# Altium PCB BuySellDisplay4.PcbDoc (part 1 of 3)
Units mm, origin at the board's own origin, x right, y up, seen from the top; angles counter-clockwise.
Board outline 355.85 x 151.13 mm, 2 copper layers (Top Layer, Bottom Layer); 219 components, 209 nets, 584 pads, 68 vias.
Unrouted connection lines stored in the file: 3.
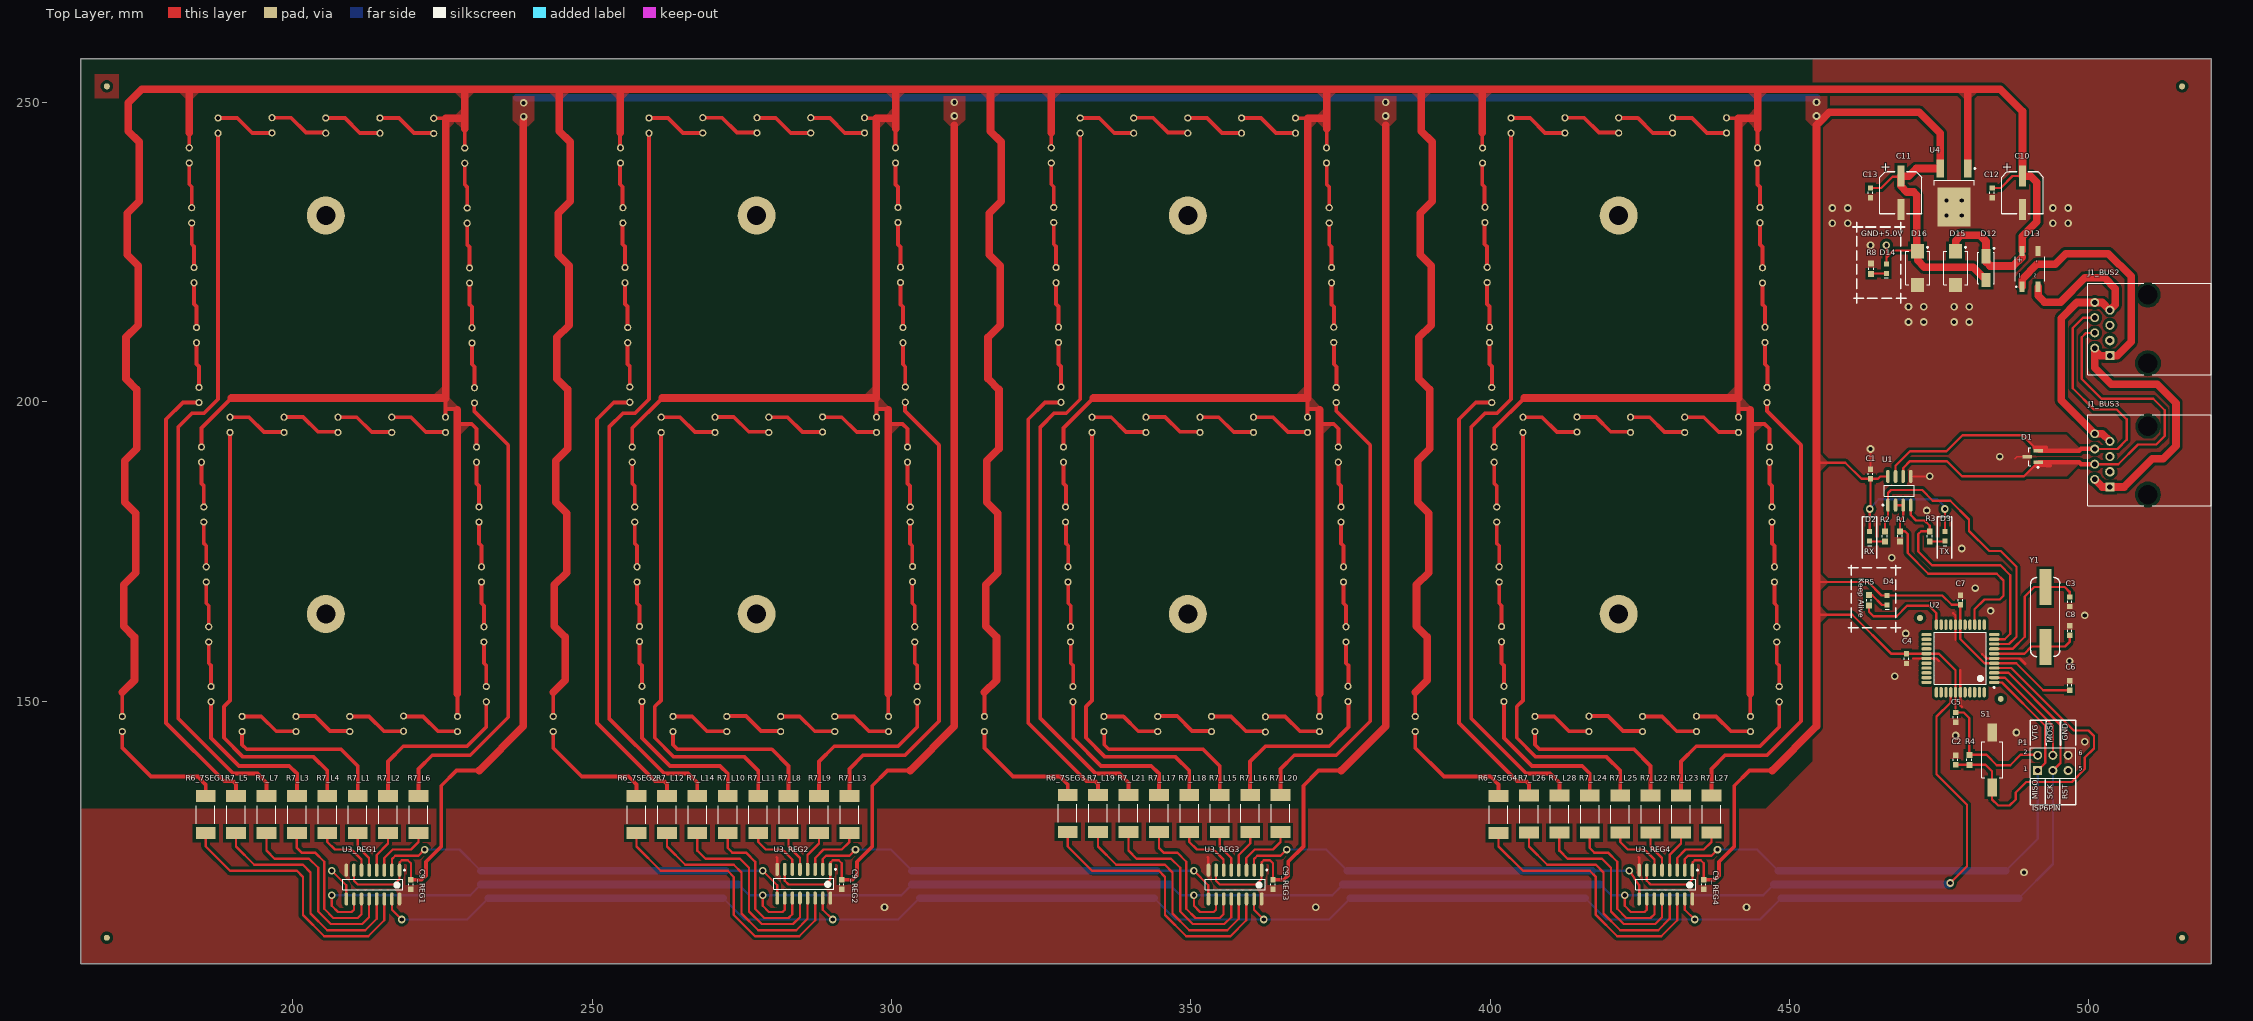
[diagram p0: Top Layer view]
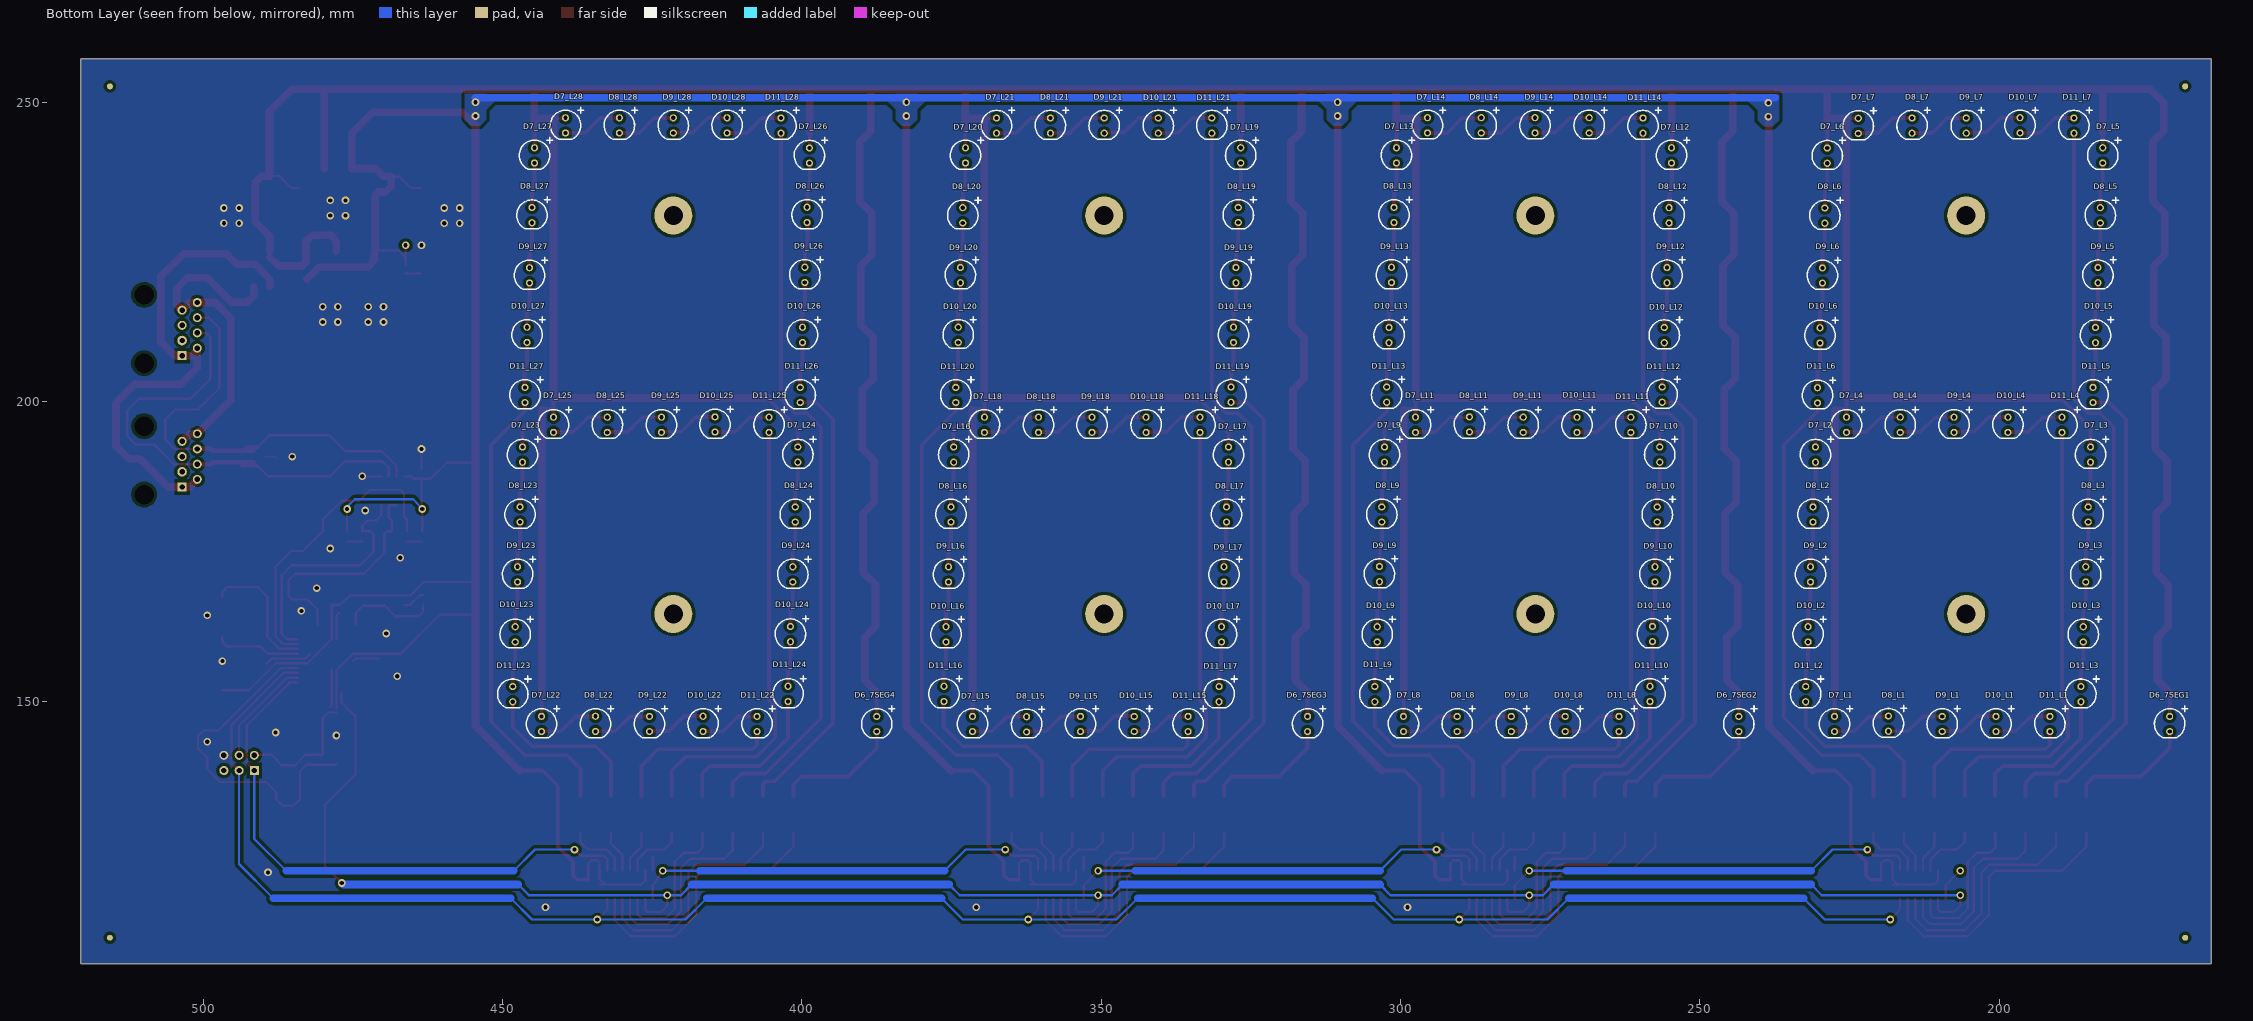
[diagram p1: Bottom Layer view, seen from below]

## Layer stack, top to bottom
Top Layer: signal copper 0.0356
Dielectric: dielectric 0.32, FR-4, Dk 4.8
Bottom Layer: signal copper 0.0356

## Board outline
520.446,106.172 520.446,257.302 164.592,257.302 164.592,106.172

## Design rules (kind name [scope] priority, off if disabled: settings)
Clearance [All] p1: gap=0.508
ComponentClearance [All] p1: gap=0.254 collisioncheckmode=3 verticalgap=0.254
PolygonConnect [All] p1: connectstyle=Direct reliefconductorwidth=0.381 reliefentries=4 polygonreliefangle="90 Angle"
RoomDefinition BUS2 [InComponentClass('BUS2')] p1: confinementstyle=ConfineIn formatcopy=TRUE lockcomponents=FALSE outline 0,0 50.8,0 50.8,25.4 0,25.4
RoomDefinition BUS3 [InComponentClass('BUS3')] p2: confinementstyle=ConfineIn formatcopy=TRUE lockcomponents=FALSE outline 0,0 50.8,0 50.8,25.4 0,25.4
RoomDefinition REG3 [InComponentClass('REG3')] p3: confinementstyle=ConfineIn formatcopy=TRUE lockcomponents=FALSE outline 0,0 50.8,0 50.8,25.4 0,25.4
RoomDefinition SUPPLY [InComponentClass('SUPPLY')] p4: confinementstyle=ConfineIn formatcopy=TRUE lockcomponents=FALSE outline 0,0 50.8,0 50.8,25.4 0,25.4
RoomDefinition CPU [InComponentClass('CPU')] p5: confinementstyle=ConfineIn formatcopy=TRUE lockcomponents=FALSE outline 0,0 50.8,0 50.8,25.4 0,25.4
RoomDefinition COM485 [InComponentClass('COM485')] p6: confinementstyle=ConfineIn formatcopy=TRUE lockcomponents=FALSE outline 0,0 50.8,0 50.8,25.4 0,25.4
RoomDefinition REG2 [InComponentClass('REG2')] p7: confinementstyle=ConfineIn formatcopy=TRUE lockcomponents=FALSE outline 0,0 50.8,0 50.8,25.4 0,25.4
RoomDefinition L6 [InComponentClass('L6')] p8: confinementstyle=ConfineIn formatcopy=TRUE lockcomponents=FALSE outline 0,0 50.8,0 50.8,25.4 0,25.4
RoomDefinition L4 [InComponentClass('L4')] p9: confinementstyle=ConfineIn formatcopy=TRUE lockcomponents=FALSE outline 0,0 50.8,0 50.8,25.4 0,25.4
RoomDefinition L7 [InComponentClass('L7')] p10: confinementstyle=ConfineIn formatcopy=TRUE lockcomponents=FALSE outline 0,0 50.8,0 50.8,25.4 0,25.4
RoomDefinition L5 [InComponentClass('L5')] p11: confinementstyle=ConfineIn formatcopy=TRUE lockcomponents=FALSE outline 0,0 50.8,0 50.8,25.4 0,25.4
RoomDefinition L3 [InComponentClass('L3')] p12: confinementstyle=ConfineIn formatcopy=TRUE lockcomponents=FALSE outline 0,0 50.8,0 50.8,25.4 0,25.4
RoomDefinition L2 [InComponentClass('L2')] p13: confinementstyle=ConfineIn formatcopy=TRUE lockcomponents=FALSE outline 0,0 50.8,0 50.8,25.4 0,25.4
RoomDefinition L1 [InComponentClass('L1')] p14: confinementstyle=ConfineIn formatcopy=TRUE lockcomponents=FALSE outline 0,0 50.8,0 50.8,25.4 0,25.4
RoomDefinition 7SEG1 [InComponentClass('7SEG1')] p15: confinementstyle=ConfineIn formatcopy=TRUE lockcomponents=FALSE outline 0,0 50.8,0 50.8,25.4 0,25.4
RoomDefinition REG4 [InComponentClass('REG4')] p16: confinementstyle=ConfineIn formatcopy=TRUE lockcomponents=FALSE outline 0,0 50.8,0 50.8,25.4 0,25.4
RoomDefinition REG1 [InComponentClass('REG1')] p17: confinementstyle=ConfineIn formatcopy=TRUE lockcomponents=FALSE outline 0,0 50.8,0 50.8,25.4 0,25.4
RoomDefinition L28 [InComponentClass('L28')] p18: confinementstyle=ConfineIn formatcopy=TRUE lockcomponents=FALSE outline 0,0 50.8,0 50.8,25.4 0,25.4
RoomDefinition L27 [InComponentClass('L27')] p19: confinementstyle=ConfineIn formatcopy=TRUE lockcomponents=FALSE outline 0,0 50.8,0 50.8,25.4 0,25.4
RoomDefinition L26 [InComponentClass('L26')] p20: confinementstyle=ConfineIn formatcopy=TRUE lockcomponents=FALSE outline 0,0 50.8,0 50.8,25.4 0,25.4
RoomDefinition L25 [InComponentClass('L25')] p21: confinementstyle=ConfineIn formatcopy=TRUE lockcomponents=FALSE outline 0,0 50.8,0 50.8,25.4 0,25.4
RoomDefinition L24 [InComponentClass('L24')] p22: confinementstyle=ConfineIn formatcopy=TRUE lockcomponents=FALSE outline 0,0 50.8,0 50.8,25.4 0,25.4
RoomDefinition L23 [InComponentClass('L23')] p23: confinementstyle=ConfineIn formatcopy=TRUE lockcomponents=FALSE outline 0,0 50.8,0 50.8,25.4 0,25.4
RoomDefinition L22 [InComponentClass('L22')] p24: confinementstyle=ConfineIn formatcopy=TRUE lockcomponents=FALSE outline 0,0 50.8,0 50.8,25.4 0,25.4
RoomDefinition L21 [InComponentClass('L21')] p25: confinementstyle=ConfineIn formatcopy=TRUE lockcomponents=FALSE outline 0,0 50.8,0 50.8,25.4 0,25.4
RoomDefinition L20 [InComponentClass('L20')] p26: confinementstyle=ConfineIn formatcopy=TRUE lockcomponents=FALSE outline 0,0 50.8,0 50.8,25.4 0,25.4
RoomDefinition L19 [InComponentClass('L19')] p27: confinementstyle=ConfineIn formatcopy=TRUE lockcomponents=FALSE outline 0,0 50.8,0 50.8,25.4 0,25.4
RoomDefinition L18 [InComponentClass('L18')] p28: confinementstyle=ConfineIn formatcopy=TRUE lockcomponents=FALSE outline 0,0 50.8,0 50.8,25.4 0,25.4
RoomDefinition L17 [InComponentClass('L17')] p29: confinementstyle=ConfineIn formatcopy=TRUE lockcomponents=FALSE outline 0,0 50.8,0 50.8,25.4 0,25.4
RoomDefinition L16 [InComponentClass('L16')] p30: confinementstyle=ConfineIn formatcopy=TRUE lockcomponents=FALSE outline 0,0 50.8,0 50.8,25.4 0,25.4
RoomDefinition L15 [InComponentClass('L15')] p31: confinementstyle=ConfineIn formatcopy=TRUE lockcomponents=FALSE outline 0,0 50.8,0 50.8,25.4 0,25.4
RoomDefinition L14 [InComponentClass('L14')] p32: confinementstyle=ConfineIn formatcopy=TRUE lockcomponents=FALSE outline 0,0 50.8,0 50.8,25.4 0,25.4
RoomDefinition L13 [InComponentClass('L13')] p33: confinementstyle=ConfineIn formatcopy=TRUE lockcomponents=FALSE outline 0,0 50.8,0 50.8,25.4 0,25.4
RoomDefinition L12 [InComponentClass('L12')] p34: confinementstyle=ConfineIn formatcopy=TRUE lockcomponents=FALSE outline 0,0 50.8,0 50.8,25.4 0,25.4
RoomDefinition L11 [InComponentClass('L11')] p35: confinementstyle=ConfineIn formatcopy=TRUE lockcomponents=FALSE outline 0,0 50.8,0 50.8,25.4 0,25.4
RoomDefinition L10 [InComponentClass('L10')] p36: confinementstyle=ConfineIn formatcopy=TRUE lockcomponents=FALSE outline 0,0 50.8,0 50.8,25.4 0,25.4
RoomDefinition L9 [InComponentClass('L9')] p37: confinementstyle=ConfineIn formatcopy=TRUE lockcomponents=FALSE outline 0,0 50.8,0 50.8,25.4 0,25.4
RoomDefinition L8 [InComponentClass('L8')] p38: confinementstyle=ConfineIn formatcopy=TRUE lockcomponents=FALSE outline 0,0 50.8,0 50.8,25.4 0,25.4
RoomDefinition 7SEG4 [InComponentClass('7SEG4')] p39: confinementstyle=ConfineIn formatcopy=TRUE lockcomponents=FALSE outline 0,0 50.8,0 50.8,25.4 0,25.4
RoomDefinition 7SEG3 [InComponentClass('7SEG3')] p40: confinementstyle=ConfineIn formatcopy=TRUE lockcomponents=FALSE outline 0,0 50.8,0 50.8,25.4 0,25.4
RoomDefinition 7SEG2 [InComponentClass('7SEG2')] p41: confinementstyle=ConfineIn formatcopy=TRUE lockcomponents=FALSE outline 0,0 50.8,0 50.8,25.4 0,25.4
RoutingVias [All] p1: holewidth=0.711 width=1.27 viastyle="Through Hole" minholewidth=0.711 minwidth=1.27 maxholewidth=0.711 maxwidth=1.27
SolderMaskExpansion [All] p1: expansion=0.102
TestPointUsage [All] p1: valid=0 allowmultiple=FALSE
Testpoint [All] p1: side=15 testpointundercomponent=TRUE minsize=1.016 maxsize=2.54 preferedsize=1.524 minholesize=0 maxholesize=1.016 preferedholesize=0.813 testpointgrid=0.025 style=1023 order=0123456789
Width GROUND [(InNet('GND'))] p1: maxlimit=0.381 minlimit=0.254 preferedwidth=0.381
Width Drain [( InNet('SEGA_7SEG1') AND InNet('SEGB_7SEG1') AND InNet('SEGC_7SEG1') AND InNet('SEGD_7SEG1') AND InNet('SEGE_7SEG1') AND InNet('SEGF_7SEG1') AND InNet('SEGG_7SEG1') AND InNet('DOT_7SEG1') AND   InNet('SEGA_7SEG2') AND InNet('SEGB_7SEG2') AND InNet('SEGC_7SEG2') AND InNet('SEGD_7SEG2') AND InNet('SEGE_7SEG2') AND InNet('SEGF_7SEG2') AND InNet('SEGG_7SEG2') AND InNet('DOT_7SEG2') AND  InNet('SEGA_7SEG3') AND InNet('SEGB_7SEG3') AND InNet('SEGC_7SEG3') AND InNet('SEGD_7SEG3') AND InNet('SEGE_7SEG3') AND InNet('SEGF_7SEG3') AND InNet('SEGG_7SEG3') AND InNet('DOT_7SEG3') AND  InNet('SEGA_7SEG4') AND InNet('SEGB_7SEG4') AND InNet('SEGC_7SEG4') AND InNet('SEGD_7SEG4') AND InNet('SEGE_7SEG4') AND InNet('SEGF_7SEG4') AND InNet('SEGG_7SEG4') AND InNet('DOT_7SEG4')   )] p2: maxlimit=0.381 minlimit=0.381 preferedwidth=0.381
Width LEDS_7SEG [(InNet('NetD7_L1_K') AND InNet('NetD7_L2_K') AND InNet('NetD7_L3_K') AND InNet('NetD7_L4_K') AND InNet('NetD7_L5_K') AND InNet('NetD7_L6_K') AND InNet('NetD7_L7_K') AND InNet('NetD7_L8_K') AND InNet('NetD7_L9_K') AND InNet('NetD7_L10_K') AND InNet('NetD7_L11_K') AND InNet('NetD7_L12_K') AND InNet('NetD7_L13_K') AND InNet('NetD7_L14_K') AND InNet('NetD7_L15_K') AND InNet('NetD7_L16_K') AND InNet('NetD7_L17_K') AND InNet('NetD7_L18_K') AND InNet('NetD7_L19_K') AND InNet('NetD7_L20_K') AND InNet('NetD7_L21_K') AND InNet('NetD7_L22_K') AND InNet('NetD7_L23_K') AND InNet('NetD7_L24_K') AND InNet('NetD7_L25_K') AND InNet('NetD7_L26_K') AND InNet('NetD7_L27_K') AND InNet('NetD7_L28_K') AND   InNet('NetD8_L1_K') AND InNet('NetD8_L2_K') AND InNet('NetD8_L3_K') AND InNet('NetD8_L4_K') AND InNet('NetD8_L5_K') AND InNet('NetD8_L6_K') AND InNet('NetD8_L7_K') AND InNet('NetD8_L8_K') AND InNet('NetD8_L9_K') AND InNet('NetD8_L10_K') AND InNet('NetD8_L11_K') AND InNet('NetD8_L12_K') AND InNet('NetD8_L13_K') AND InNet('NetD8_L14_K') AND InNet('NetD8_L15_K') AND InNet('NetD8_L16_K') AND InNet('NetD8_L17_K') AND InNet('NetD8_L18_K') AND InNet('NetD8_L19_K') AND InNet('NetD8_L20_K') AND InNet('NetD8_L21_K') AND InNet('NetD8_L22_K') AND InNet('NetD8_L23_K') AND InNet('NetD8_L24_K') AND InNet('NetD8_L25_K') AND InNet('NetD8_L26_K') AND InNet('NetD8_L27_K') AND InNet('NetD8_L28_K') AND    InNet('NetD9_L1_K') AND InNet('NetD9_L2_K') AND InNet('NetD9_L3_K') AND InNet('NetD9_L4_K') AND InNet('NetD9_L5_K') AND InNet('NetD9_L6_K') AND InNet('NetD9_L7_K') AND InNet('NetD9_L8_K') AND InNet('NetD9_L9_K') AND InNet('NetD9_L10_K') AND InNet('NetD9_L11_K') AND InNet('NetD9_L12_K') AND InNet('NetD9_L13_K') AND InNet('NetD9_L14_K') AND InNet('NetD9_L15_K') AND InNet('NetD9_L16_K') AND InNet('NetD9_L17_K') AND InNet('NetD9_L18_K') AND InNet('NetD9_L19_K') AND InNet('NetD9_L20_K') AND InNet('NetD9_L21_K') AND InNet('NetD9_L22_K') AND InNet('NetD9_L23_K') AND InNet('NetD9_L24_K') AND InNet('NetD9_L25_K') AND InNet('NetD9_L26_K') AND InNet('NetD9_L27_K') AND InNet('NetD9_L28_K') AND    InNet('NetD10_L1_K') AND InNet('NetD10_L2_K') AND InNet('NetD10_L3_K') AND InNet('NetD10_L4_K') AND InNet('NetD10_L5_K') AND InNet('NetD10_L6_K') AND InNet('NetD10_L7_K') AND InNet('NetD10_L8_K') AND InNet('NetD10_L9_K') AND InNet('NetD10_L10_K') AND InNet('NetD10_L11_K') AND InNet('NetD10_L12_K') AND InNet('NetD10_L13_K') AND InNet('NetD10_L14_K') AND InNet('NetD10_L15_K') AND InNet('NetD10_L16_K') AND InNet('NetD10_L17_K') AND InNet('NetD10_L18_K') AND InNet('NetD10_L19_K') AND InNet('NetD10_L20_K') AND InNet('NetD10_L21_K') AND InNet('NetD10_L22_K') AND InNet('NetD10_L23_K') AND InNet('NetD10_L24_K') AND InNet('NetD10_L25_K') AND InNet('NetD10_L26_K') AND InNet('NetD10_L27_K') AND InNet('NetD10_L28_K') AND    InNet('NetD11_L1_K') AND InNet('NetD11_L2_K') AND InNet('NetD11_L3_K') AND InNet('NetD11_L4_K') AND InNet('NetD11_L5_K') AND InNet('NetD11_L6_K') AND InNet('NetD11_L7_K') AND InNet('NetD11_L8_K') AND InNet('NetD11_L9_K') AND InNet('NetD11_L10_K') AND InNet('NetD11_L11_K') AND InNet('NetD11_L12_K') AND InNet('NetD11_L13_K') AND InNet('NetD11_L14_K') AND InNet('NetD11_L15_K') AND InNet('NetD11_L16_K') AND InNet('NetD11_L17_K') AND InNet('NetD11_L18_K') AND InNet('NetD11_L19_K') AND InNet('NetD11_L20_K') AND InNet('NetD11_L21_K') AND InNet('NetD11_L22_K') AND InNet('NetD11_L23_K') AND InNet('NetD11_L24_K') AND InNet('NetD11_L25_K') AND InNet('NetD11_L26_K') AND InNet('NetD11_L27_K') AND InNet('NetD11_L28_K')  )] p3: maxlimit=1.27 minlimit=0.508 preferedwidth=1.27
Width Power [(InNet('POWER_V+') AND InNet('POWER_V-'))] p4: maxlimit=1.27 minlimit=0.635 preferedwidth=1.27
18 further rules are at their usual default settings.

## Classes and differential pairs
component class BUS2: J1_BUS1 J1_BUS2
component class BUS3: J1_BUS3
component class REG1: C9_REG1 U3_REG1
component class REG2: C9_REG2 U3_REG2
component class REG3: C9_REG3 U3_REG3
component class REG4: C9_REG4 U3_REG4
channel class TPIC6B595_CommunicationInterface: REG1 REG2 REG3 REG4
channel class Line: L1 L2 L3 L4 L5 L6 L7 L8 L9 L10 L11 L12 L13 L14 L15 L16 L17 L18 L19 L20 L21 L22 L23 L24 L25 L26 L27 L28
channel class Led7Seg: 7SEG1 7SEG2 7SEG3 7SEG4
channel class BUSConnector: BUS2 BUS3
component class SUPPLY: C10 C11 C12 C13 D12 D13 D14 D15 D16 R8 U4
component class L28: D7_L28 D8_L28 D9_L28 D10_L28 D11_L28 R7_L28
component class L27: D7_L27 D8_L27 D9_L27 D10_L27 D11_L27 R7_L27
component class L26: D7_L26 D8_L26 D9_L26 D10_L26 D11_L26 R7_L26
component class L25: D7_L25 D8_L25 D9_L25 D10_L25 D11_L25 R7_L25
component class L24: D7_L24 D8_L24 D9_L24 D10_L24 D11_L24 R7_L24
component class L23: D7_L23 D8_L23 D9_L23 D10_L23 D11_L23 R7_L23
component class L22: D7_L22 D8_L22 D9_L22 D10_L22 D11_L22 R7_L22
component class L21: D7_L21 D8_L21 D9_L21 D10_L21 D11_L21 R7_L21
component class L20: D7_L20 D8_L20 D9_L20 D10_L20 D11_L20 R7_L20
component class L19: D7_L19 D8_L19 D9_L19 D10_L19 D11_L19 R7_L19
component class L18: D7_L18 D8_L18 D9_L18 D10_L18 D11_L18 R7_L18
component class L17: D7_L17 D8_L17 D9_L17 D10_L17 D11_L17 R7_L17
component class L16: D7_L16 D8_L16 D9_L16 D10_L16 D11_L16 R7_L16
component class L15: D7_L15 D8_L15 D9_L15 D10_L15 D11_L15 R7_L15
component class L14: D7_L14 D8_L14 D9_L14 D10_L14 D11_L14 R7_L14
component class L13: D7_L13 D8_L13 D9_L13 D10_L13 D11_L13 R7_L13
component class L12: D7_L12 D8_L12 D9_L12 D10_L12 D11_L12 R7_L12
component class L11: D7_L11 D8_L11 D9_L11 D10_L11 D11_L11 R7_L11
component class L10: D7_L10 D8_L10 D9_L10 D10_L10 D11_L10 R7_L10
component class L9: D7_L9 D8_L9 D9_L9 D10_L9 D11_L9 R7_L9
component class L8: D7_L8 D8_L8 D9_L8 D10_L8 D11_L8 R7_L8
component class L7: D7_L7 D8_L7 D9_L7 D10_L7 D11_L7 R7_L7
component class L6: D7_L6 D8_L6 D9_L6 D10_L6 D11_L6 R7_L6
component class L5: D7_L5 D8_L5 D9_L5 D10_L5 D11_L5 R7_L5
component class L4: D7_L4 D8_L4 D9_L4 D10_L4 D11_L4 R7_L4
component class L3: D7_L3 D8_L3 D9_L3 D10_L3 D11_L3 R7_L3
component class L2: D7_L2 D8_L2 D9_L2 D10_L2 D11_L2 R7_L2
component class L1: D7_L1 D8_L1 D9_L1 D10_L1 D11_L1 R7_L1
component class CPU: C2 C3 C4 C5 C6 C7 C8 D4 P1 R4 R5 S1 U2 Y1
component class COM485: C1 D1 D2 D3 R1 R2 R3 U1
component class 7SEG4: D6_7SEG4 R6_7SEG4
component class 7SEG3: D6_7SEG3 R6_7SEG3
component class 7SEG2: D6_7SEG2 R6_7SEG2
component class 7SEG1: D6_7SEG1 R6_7SEG1

## Components (designator, comment, footprint, x,y, rotation, side; value= is the part's Value field where it differs from the comment)
C1 "CAP0.1uF" CAP0603 463.55,187.96 r90 top
C2 "CAP0.1uF" CAP0603 477.774,140.208 r90 top
C3 "CAP18pF" CAP0603 496.824,166.624 r270 top
C4 "CAP0.1uF" CAP0603 469.568,157.115 r270 top
C5 "CAP0.1uF" CAP0603 477.774,147.32 r270 top
C6 "CAP0.1uF" CAP0603 496.824,152.654 r90 top
C7 "CAP0.1uF" CAP0603 478.585,166.894 r90 top
C8 "CAP18pF" CAP0603 496.824,161.798 r90 top
C9_REG1 "CAP0.1uF" CAP0603 219.71,119.38 r270 top (schematic designator C9)
C9_REG2 "CAP0.1uF" CAP0603 291.694,119.38 r270 top (schematic designator C9)
C9_REG3 "CAP0.1uF" CAP0603 363.728,119.38 r270 top (schematic designator C9)
C9_REG4 "CAP0.1uF" CAP0603 435.712,119.38 r270 top (schematic designator C9)
C10 "CAP100uF" EEH-ZA1E101XP 488.95,234.95 r270 top
C11 "CAP47uF" EEH-ZA1E101XP 468.63,234.95 r270 top
C12 "CAP0.1uF" CAP0603 483.87,234.95 r270 top
C13 "CAP0.1uF" CAP0603 463.55,234.95 r270 top
D1 "SM712-02HTG" SW712 490.656,190.881 r180 top
D2 "LEDY" 150060YS75000 463.423,177.546 r90 top
D3 "LEDY" 150060YS75000 475.996,177.546 r90 top
D4 "LEDY" 150060YS75000 466.344,166.878 r90 top
D6_7SEG1 "Oval Led" LED 171.501,147.472 r270 bottom (schematic designator D6)
D6_7SEG2 "Oval Led" LED 243.484,147.472 r270 bottom (schematic designator D6)
D6_7SEG3 "Oval Led" LED 315.519,147.472 r270 bottom (schematic designator D6)
D6_7SEG4 "Oval Led" LED 387.502,147.472 r270 bottom (schematic designator D6)
D7_L1 "Oval Led" LED 227.482,147.472 r270 bottom (schematic designator D7)
D7_L2 "Oval Led" LED 230.683,192.481 r270 bottom (schematic designator D7)
D7_L3 "Oval Led" LED 184.709,192.481 r270 bottom (schematic designator D7)
D7_L4 "Oval Led" LED 225.501,197.46 r270 bottom (schematic designator D7)
D7_L5 "Oval Led" LED 182.677,242.468 r270 bottom (schematic designator D7)
D7_L6 "Oval Led" LED 228.702,242.418 r270 bottom (schematic designator D7)
D7_L7 "Oval Led" LED 223.52,247.396 r270 bottom (schematic designator D7)
D7_L8 "Oval Led" LED 299.517,147.472 r270 bottom (schematic designator D7)
D7_L9 "Oval Led" LED 302.666,192.481 r270 bottom (schematic designator D7)
D7_L10 "Oval Led" LED 256.692,192.481 r270 bottom (schematic designator D7)
D7_L11 "Oval Led" LED 297.485,197.46 r270 bottom (schematic designator D7)
D7_L12 "Oval Led" LED 254.711,242.468 r270 bottom (schematic designator D7)
D7_L13 "Oval Led" LED 300.685,242.468 r270 bottom (schematic designator D7)
D7_L14 "Oval Led" LED 295.504,247.498 r270 bottom (schematic designator D7)
D7_L15 "Oval Led" LED 371.5,147.472 r270 bottom (schematic designator D7)
D7_L16 "Oval Led" LED 374.65,192.481 r270 bottom (schematic designator D7)
D7_L17 "Oval Led" LED 328.727,192.481 r270 bottom (schematic designator D7)
D7_L18 "Oval Led" LED 369.519,197.46 r270 bottom (schematic designator D7)
D7_L19 "Oval Led" LED 326.695,242.468 r270 bottom (schematic designator D7)
D7_L20 "Oval Led" LED 372.669,242.468 r270 bottom (schematic designator D7)
D7_L21 "Oval Led" LED 367.487,247.447 r270 bottom (schematic designator D7)
D7_L22 "Oval Led" LED 443.509,147.472 r270 bottom (schematic designator D7)
D7_L23 "Oval Led" LED 446.684,192.481 r270 bottom (schematic designator D7)
D7_L24 "Oval Led" LED 400.685,192.481 r270 bottom (schematic designator D7)
D7_L25 "Oval Led" LED 441.503,197.46 r270 bottom (schematic designator D7)
D7_L26 "Oval Led" LED 398.755,242.443 r270 bottom (schematic designator D7)
D7_L27 "Oval Led" LED 444.678,242.468 r270 bottom (schematic designator D7)
D7_L28 "Oval Led" LED 439.496,247.472 r270 bottom (schematic designator D7)
D8_L1 "Oval Led" LED 218.491,147.523 r270 bottom (schematic designator D8)
D8_L2 "Oval Led" LED 231.089,182.474 r270 bottom (schematic designator D8)
D8_L3 "Oval Led" LED 185.115,182.474 r270 bottom (schematic designator D8)
D8_L4 "Oval Led" LED 216.51,197.46 r270 bottom (schematic designator D8)
D8_L5 "Oval Led" LED 183.083,232.461 r270 bottom (schematic designator D8)
D8_L6 "Oval Led" LED 229.108,232.41 r270 bottom (schematic designator D8)
D8_L7 "Oval Led" LED 214.528,247.447 r270 bottom (schematic designator D8)
D8_L8 "Oval Led" LED 290.525,147.472 r270 bottom (schematic designator D8)
D8_L9 "Oval Led" LED 303.124,182.474 r270 bottom (schematic designator D8)
D8_L10 "Oval Led" LED 257.099,182.474 r270 bottom (schematic designator D8)
D8_L11 "Oval Led" LED 288.493,197.51 r270 bottom (schematic designator D8)
D8_L12 "Oval Led" LED 255.118,232.461 r270 bottom (schematic designator D8)
D8_L13 "Oval Led" LED 301.092,232.512 r270 bottom (schematic designator D8)
D8_L14 "Oval Led" LED 286.512,247.498 r270 bottom (schematic designator D8)
D8_L15 "Oval Led" LED 362.458,147.422 r270 bottom (schematic designator D8)
D8_L16 "Oval Led" LED 375.107,182.474 r270 bottom (schematic designator D8)
D8_L17 "Oval Led" LED 329.082,182.474 r270 bottom (schematic designator D8)
D8_L18 "Oval Led" LED 360.477,197.46 r270 bottom (schematic designator D8)
D8_L19 "Oval Led" LED 327.101,232.512 r270 bottom (schematic designator D8)
D8_L20 "Oval Led" LED 373.126,232.461 r270 bottom (schematic designator D8)
D8_L21 "Oval Led" LED 358.496,247.447 r270 bottom (schematic designator D8)
D8_L22 "Oval Led" LED 434.492,147.498 r270 bottom (schematic designator D8)
D8_L23 "Oval Led" LED 447.091,182.474 r270 bottom (schematic designator D8)
D8_L24 "Oval Led" LED 401.117,182.474 r270 bottom (schematic designator D8)
D8_L25 "Oval Led" LED 432.511,197.46 r270 bottom (schematic designator D8)
D8_L26 "Oval Led" LED 399.136,232.537 r270 bottom (schematic designator D8)
D8_L27 "Oval Led" LED 445.11,232.486 r270 bottom (schematic designator D8)
D8_L28 "Oval Led" LED 430.505,247.472 r270 bottom (schematic designator D8)
D9_L1 "Oval Led" LED 209.499,147.472 r270 bottom (schematic designator D9)
D9_L2 "Oval Led" LED 231.496,172.466 r270 bottom (schematic designator D9)
D9_L3 "Oval Led" LED 185.522,172.466 r270 bottom (schematic designator D9)
D9_L4 "Oval Led" LED 207.518,197.46 r270 bottom (schematic designator D9)
D9_L5 "Oval Led" LED 183.49,222.453 r270 bottom (schematic designator D9)
D9_L6 "Oval Led" LED 229.514,222.402 r270 bottom (schematic designator D9)
D9_L7 "Oval Led" LED 205.486,247.447 r270 bottom (schematic designator D9)
D9_L8 "Oval Led" LED 281.483,147.472 r270 bottom (schematic designator D9)
D9_L9 "Oval Led" LED 303.53,172.517 r270 bottom (schematic designator D9)
D9_L10 "Oval Led" LED 257.505,172.466 r270 bottom (schematic designator D9)
D9_L11 "Oval Led" LED 279.502,197.46 r270 bottom (schematic designator D9)
D9_L12 "Oval Led" LED 255.473,222.453 r270 bottom (schematic designator D9)
D9_L13 "Oval Led" LED 301.498,222.504 r270 bottom (schematic designator D9)
D9_L14 "Oval Led" LED 277.52,247.498 r270 bottom (schematic designator D9)
D9_L15 "Oval Led" LED 353.466,147.472 r270 bottom (schematic designator D9)
D9_L16 "Oval Led" LED 375.514,172.466 r270 bottom (schematic designator D9)
D9_L17 "Oval Led" LED 329.489,172.466 r270 bottom (schematic designator D9)
D9_L18 "Oval Led" LED 351.536,197.46 r270 bottom (schematic designator D9)
D9_L19 "Oval Led" LED 327.508,222.453 r270 bottom (schematic designator D9)
D9_L20 "Oval Led" LED 373.532,222.453 r270 bottom (schematic designator D9)
D9_L21 "Oval Led" LED 349.504,247.447 r270 bottom (schematic designator D9)
D9_L22 "Oval Led" LED 425.475,147.472 r270 bottom (schematic designator D9)
D9_L23 "Oval Led" LED 447.497,172.466 r270 bottom (schematic designator D9)
D9_L24 "Oval Led" LED 401.523,172.466 r270 bottom (schematic designator D9)
D9_L25 "Oval Led" LED 423.469,197.46 r270 bottom (schematic designator D9)
D9_L26 "Oval Led" LED 399.517,222.504 r270 bottom (schematic designator D9)
D9_L27 "Oval Led" LED 445.516,222.428 r270 bottom (schematic designator D9)
D9_L28 "Oval Led" LED 421.488,247.472 r270 bottom (schematic designator D9)
D10_L1 "Oval Led" LED 200.508,147.472 r270 bottom (schematic designator D10)
D10_L2 "Oval Led" LED 231.902,162.458 r270 bottom (schematic designator D10)
D10_L3 "Oval Led" LED 185.928,162.458 r270 bottom (schematic designator D10)
D10_L4 "Oval Led" LED 198.526,197.46 r270 bottom (schematic designator D10)
D10_L5 "Oval Led" LED 183.896,212.446 r270 bottom (schematic designator D10)
D10_L6 "Oval Led" LED 229.921,212.395 r270 bottom (schematic designator D10)
D10_L7 "Oval Led" LED 196.494,247.498 r270 bottom (schematic designator D10)
D10_L8 "Oval Led" LED 272.491,147.472 r270 bottom (schematic designator D10)
D10_L9 "Oval Led" LED 303.886,162.458 r270 bottom (schematic designator D10)
D10_L10 "Oval Led" LED 257.912,162.509 r270 bottom (schematic designator D10)
D10_L11 "Oval Led" LED 270.51,197.46 r270 bottom (schematic designator D10)
D10_L12 "Oval Led" LED 255.93,212.446 r270 bottom (schematic designator D10)
D10_L13 "Oval Led" LED 301.904,212.446 r270 bottom (schematic designator D10)
D10_L14 "Oval Led" LED 268.478,247.498 r270 bottom (schematic designator D10)
D10_L15 "Oval Led" LED 344.475,147.472 r270 bottom (schematic designator D10)
D10_L16 "Oval Led" LED 375.92,162.458 r270 bottom (schematic designator D10)
D10_L17 "Oval Led" LED 329.895,162.458 r270 bottom (schematic designator D10)
D10_L18 "Oval Led" LED 342.494,197.46 r270 bottom (schematic designator D10)
D10_L19 "Oval Led" LED 327.914,212.496 r270 bottom (schematic designator D10)
D10_L20 "Oval Led" LED 373.888,212.496 r270 bottom (schematic designator D10)
D10_L21 "Oval Led" LED 340.462,247.447 r270 bottom (schematic designator D10)
D10_L22 "Oval Led" LED 416.509,147.498 r270 bottom (schematic designator D10)
D10_L23 "Oval Led" LED 447.904,162.458 r270 bottom (schematic designator D10)
D10_L24 "Oval Led" LED 401.93,162.484 r270 bottom (schematic designator D10)
D10_L25 "Oval Led" LED 414.528,197.51 r270 bottom (schematic designator D10)
D10_L26 "Oval Led" LED 399.898,212.471 r270 bottom (schematic designator D10)
D10_L27 "Oval Led" LED 445.922,212.496 r270 bottom (schematic designator D10)
D10_L28 "Oval Led" LED 412.496,247.472 r270 bottom (schematic designator D10)
D11_L1 "Oval Led" LED 191.516,147.472 r270 bottom (schematic designator D11)
D11_L2 "Oval Led" LED 232.308,152.451 r270 bottom (schematic designator D11)
D11_L3 "Oval Led" LED 186.334,152.451 r270 bottom (schematic designator D11)
D11_L4 "Oval Led" LED 189.484,197.46 r270 bottom (schematic designator D11)
D11_L5 "Oval Led" LED 184.302,202.438 r270 bottom (schematic designator D11)
D11_L6 "Oval Led" LED 230.327,202.387 r270 bottom (schematic designator D11)
D11_L7 "Oval Led" LED 187.503,247.447 r270 bottom (schematic designator D11)
D11_L8 "Oval Led" LED 263.5,147.472 r270 bottom (schematic designator D11)
D11_L9 "Oval Led" LED 304.292,152.451 r270 bottom (schematic designator D11)
D11_L10 "Oval Led" LED 258.318,152.502 r270 bottom (schematic designator D11)
D11_L11 "Oval Led" LED 261.518,197.46 r270 bottom (schematic designator D11)
D11_L12 "Oval Led" LED 256.286,202.489 r270 bottom (schematic designator D11)
D11_L13 "Oval Led" LED 302.311,202.489 r270 bottom (schematic designator D11)
D11_L14 "Oval Led" LED 259.486,247.447 r270 bottom (schematic designator D11)
D11_L15 "Oval Led" LED 335.483,147.472 r270 bottom (schematic designator D11)
D11_L16 "Oval Led" LED 376.276,152.502 r270 bottom (schematic designator D11)
D11_L17 "Oval Led" LED 330.302,152.451 r270 bottom (schematic designator D11)
D11_L18 "Oval Led" LED 333.502,197.46 r270 bottom (schematic designator D11)
D11_L19 "Oval Led" LED 328.32,202.489 r270 bottom (schematic designator D11)
D11_L20 "Oval Led" LED 374.294,202.438 r270 bottom (schematic designator D11)
D11_L21 "Oval Led" LED 331.521,247.447 r270 bottom (schematic designator D11)
D11_L22 "Oval Led" LED 407.492,147.472 r270 bottom (schematic designator D11)
D11_L23 "Oval Led" LED 448.31,152.451 r270 bottom (schematic designator D11)
D11_L24 "Oval Led" LED 402.311,152.502 r270 bottom (schematic designator D11)
D11_L25 "Oval Led" LED 405.486,197.46 r270 bottom (schematic designator D11)
D11_L26 "Oval Led" LED 400.279,202.438 r270 bottom (schematic designator D11)
D11_L27 "Oval Led" LED 446.278,202.438 r270 bottom (schematic designator D11)
D11_L28 "Oval Led" LED 403.504,247.447 r270 bottom (schematic designator D11)
D12 "S1M-E3/5AT" S1M-E3/5AT 482.854,222.377 r270 top
D13 "MB6S-E3/80" MB6S-E3/80 490.22,222.25 r90 top
D14 "LEDY" 150060YS75000 466.217,222.25 r90 top
D15 "TVS12V" SMBJ5.0A 477.774,222.377 r270 top
D16 "TVS5.0V" SMBJ5.0A 471.424,222.377 r270 top
J1_BUS2 "RJ45" 15-43-6233 520.446,212.176 r90 top (schematic designator J1)
J1_BUS3 "RJ45" 15-43-6233 520.445,190.246 r90 top (schematic designator J1)
P1 "ISP" HDR2X3 491.49,138.43 r0 top
R1 "RES4.7K" RES0603 468.503,177.546 r270 top
R2 "RES4.7K" RES0603 465.963,177.546 r90 top
R3 "RES4.7K" RES0603 473.456,177.546 r90 top
R4 "RES4.7K" RES0603 480.06,140.208 r90 top
R5 "RES4.7K" RES0603 463.296,166.878 r90 top
R6_7SEG1 "RES470" RES2512 185.42,131.064 r270 top (schematic designator R6)
R6_7SEG2 "RES470" RES2512 257.404,131.064 r270 top (schematic designator R6)
R6_7SEG3 "RES470" RES2512 329.438,131.266 r270 top (schematic designator R6)
R6_7SEG4 "RES470" RES2512 401.422,131.064 r270 top (schematic designator R6)
R7_L1 "RES120" RES2512 210.82,131.064 r270 top (schematic designator R7)
R7_L2 "RES120" RES2512 215.9,131.064 r270 top (schematic designator R7)
R7_L3 "RES120" RES2512 200.66,131.064 r270 top (schematic designator R7)
R7_L4 "RES120" RES2512 205.74,131.064 r270 top (schematic designator R7)
R7_L5 "RES120" RES2512 190.5,131.064 r270 top (schematic designator R7)
R7_L6 "RES120" RES2512 220.98,131.064 r270 top (schematic designator R7)
R7_L7 "RES120" RES2512 195.58,131.064 r270 top (schematic designator R7)
R7_L8 "RES120" RES2512 282.804,131.064 r270 top (schematic designator R7)
R7_L9 "RES120" RES2512 287.884,131.064 r270 top (schematic designator R7)
R7_L10 "RES120" RES2512 272.644,131.064 r270 top (schematic designator R7)
R7_L11 "RES120" RES2512 277.724,131.064 r270 top (schematic designator R7)
R7_L12 "RES120" RES2512 262.484,131.064 r270 top (schematic designator R7)
R7_L13 "RES120" RES2512 292.964,131.064 r270 top (schematic designator R7)
R7_L14 "RES120" RES2512 267.564,131.064 r270 top (schematic designator R7)
R7_L15 "RES120" RES2512 354.838,131.266 r270 top (schematic designator R7)
R7_L16 "RES120" RES2512 359.918,131.266 r270 top (schematic designator R7)
R7_L17 "RES120" RES2512 344.678,131.266 r270 top (schematic designator R7)
R7_L18 "RES120" RES2512 349.758,131.266 r270 top (schematic designator R7)
R7_L19 "RES120" RES2512 334.518,131.266 r270 top (schematic designator R7)
R7_L20 "RES120" RES2512 364.998,131.266 r270 top (schematic designator R7)
R7_L21 "RES120" RES2512 339.598,131.266 r270 top (schematic designator R7)
R7_L22 "RES120" RES2512 426.822,131.139 r270 top (schematic designator R7)
R7_L23 "RES120" RES2512 431.902,131.139 r270 top (schematic designator R7)
R7_L24 "RES120" RES2512 416.662,131.139 r270 top (schematic designator R7)
R7_L25 "RES120" RES2512 421.742,131.139 r270 top (schematic designator R7)
R7_L26 "RES120" RES2512 406.502,131.139 r270 top (schematic designator R7)
R7_L27 "RES120" RES2512 436.982,131.139 r270 top (schematic designator R7)
R7_L28 "RES120" RES2512 411.582,131.139 r270 top (schematic designator R7)
R8 "RES4.7K" RES0603 463.677,222.25 r90 top
S1 "SW-PB" microswitch 483.87,140.208 r90 top
U1 "MAX485CSA" NSO8_N 468.376,185.166 r90 top
U2 "ATmega1284P-AU" 44A_N 478.564,157.151 r180 top
U3_REG1 "POWER SHIFT REG" NPIC6C595_Q100_SOIC16 213.36,119.38 r270 top (schematic designator U3)
U3_REG2 "POWER SHIFT REG" NPIC6C595_Q100_SOIC16 285.344,119.52 r270 top (schematic designator U3)
U3_REG3 "POWER SHIFT REG" NPIC6C595_Q100_SOIC16 357.403,119.38 r270 top (schematic designator U3)
U3_REG4 "POWER SHIFT REG" NPIC6C595_Q100_SOIC16 429.362,119.38 r270 top (schematic designator U3)
U4 "MC7805CDTRKG" MC7805CDTRKG 477.52,234.95 r270 top
Y1 "XTAL" Crystal20MHz 492.76,164.084 r90 top

## Footprints (in the part's own frame and the unit in brackets; to place one, negate y for a bottom-side part, rotate by r counter-clockwise, add the part's x,y. Pads: shape width x height; smd on the part's side, far side on the other; paste and mask are expansions set on the pad)
15-43-6233 [mm] "Connector; PCB Jack, Thru-Hole; 1-Port; Unshielded without Lightpipes; Right Angle"
  rect 1.5x1.5 hole 0.9: 1(-4.445,16.89)
  round 1.5 hole 0.9: 2(-3.175,19.43) 4(-0.635,19.43) 5(0.635,16.89) 6(1.905,19.43) 7(3.175,16.89) 8(4.445,19.43)
  round 1.6 hole 0.9: 3(-1.905,16.89)
  round 2.95 hole 3.25 unplated: MH1(-5.715,10.54) MH2(5.715,10.54)
  silkscreen extent -7.62,0 7.62,20.58
44A_N [mm] "Thin QFP, 44-Leads, Body 10x10mm, Pitch 0.8mm, IPC Medium Density"
  oval 1.75x0.55 smd: 1(-5.65,4) 2(-5.65,3.2) 3(-5.65,2.4) 4(-5.65,1.6) 5(-5.65,0.8) 6(-5.65,0) 7(-5.65,-0.8) 8(-5.65,-1.6) 9(-5.65,-2.4) 10(-5.65,-3.2) 11(-5.65,-4) 23(5.65,-4) 24(5.65,-3.2) 25(5.65,-2.4) 26(5.65,-1.6) 27(5.65,-0.8) 28(5.65,0) 29(5.65,0.8) 30(5.65,1.6) 31(5.65,2.4) 32(5.65,3.2) 33(5.65,4)
  oval 0.55x1.75 smd: 12(-4,-5.65) 13(-3.2,-5.65) 14(-2.4,-5.65) 15(-1.6,-5.65) 16(-0.8,-5.65) 17(0,-5.65) 18(0.8,-5.65) 19(1.6,-5.65) 20(2.4,-5.65) 21(3.2,-5.65) 22(4,-5.65) 34(4,5.65) 35(3.2,5.65) 36(2.4,5.65) 37(1.6,5.65) 38(0.8,5.65) 39(0,5.65) 40(-0.8,5.65) 41(-1.6,5.65) 42(-2.4,5.65) 43(-3.2,5.65) 44(-4,5.65)
  silkscreen extent -5.77,-4.35 4.35,4.95, body extent -5,-5 5,5, height 1.2
150060YS75000 [mm]
  rect 0.85x0.85 smd: 1(-0.8,0) 2(0.8,0)
  silkscreen extent -1.53,-0.32 -1.53,0.33, body extent -0.85,-0.45 0.85,0.45, height 2.44
CAP0603 [mm] "Capacitores cerámicos de capas múltiples (MLCC) - SMD/SMT 0603 0.1uF 16volts X7R 5%"
  rect 0.9x0.9 smd: 1(-0.8,0) 2(0.8,0)
  silkscreen extent -0.15,-0.35 0.15,0.35, body extent -0.83,-0.43 0.82,0.42, height 0.85
Crystal20MHz [mm]
  rect 6x2 smd: 1(-5,0) 2(5,0)
  silkscreen extent -6.64,-2.45 6.6,2.45, body extent -6.6,-2.4 6.6,2.4, height 4.3
EEH-ZA1E101XP [mm] "EEH-ZA1E101XP"
  rect 3.5x1.2 smd: 1(-2.794,0) 2(2.794,0)
  silkscreen extent -3.5,-3.5 3.5,3.5
HDR2X3 [mm] "Connector; Header; 3x2 Position"
  rect 1.5x1.5 hole 0.9: 1(0,0)
  round 1.5 hole 0.9: 2(0,2.54) 3(2.54,0) 4(2.54,2.54) 5(5.08,0) 6(5.08,2.54)
  silkscreen extent -1.27,-1.27 6.35,3.81
LED [mm]
  round 1.2 hole 0.7: A(0,0) K(2.54,0)
  silkscreen extent -1.78,-2.54 3.56,3.05
MB6S-E3/80 [mm] "MB6S-E3/80"
  rect 1.7x0.85 smd: 1(-3,1.335) 2(-3,-1.335) 3(3,-1.335) 4(3,1.335)
  silkscreen extent -3.12,-2.45 2.05,2.45, body extent -2.05,-2.47 2.05,2.48, height 2.9
MC7805CDTRKG [mm] "MC7805CDTRKG"
  rect 3.05x1.25 smd: 1(-4.05,2.29) 3(-4.05,-2.29)
  rect 6.5x5.55 smd: 4(2.4,0)
  silkscreen extent -4.17,-3.35 -1.25,3.59, body extent -2.5,-3.37 3.72,3.37, height 2.38
microswitch [mm]
  rect 3x1.6 smd: 1(-4.59,0) 2(4.59,0)
  silkscreen extent -3,-1.75 3,1.75, body extent -3,-1.75 3,1.75, height 4.57
NPIC6C595_Q100_SOIC16 [mm]
  oval 2.2x0.6 smd: 1(-2.4,4.445) 2(-2.4,3.175) 3(-2.4,1.905) 4(-2.4,0.635) 5(-2.4,-0.635) 6(-2.4,-1.905) 7(-2.4,-3.175) 8(-2.4,-4.445) 9(2.4,-4.445) 10(2.4,-3.175) 11(2.4,-1.905) 12(2.4,-0.635) 13(2.4,0.635) 14(2.4,1.905) 15(2.4,3.175) 16(2.4,4.445)
  silkscreen extent -2.52,-5 0.9,5.42, body extent -2,-5 2,5, height 1.75
NSO8_N [mm] "SOIC, 8-Leads, Body 4.9x3.9mm, Pitch 1.27mm, IPC Medium Density"
  oval 2.2x0.6 smd: 1(-2.4,1.905) 2(-2.4,0.635) 3(-2.4,-0.635) 4(-2.4,-1.905) 5(2.4,-1.905) 6(2.4,-0.635) 7(2.4,0.635) 8(2.4,1.905)
  silkscreen extent -2.52,-2.5 0.9,2.88, body extent -1.95,-2.45 1.95,2.45, height 1.75
RES0603 [mm]
  rect 1x1 smd: 1(-0.85,0) 2(0.85,0)
  silkscreen extent -0.15,-0.4 0.15,0.4, body extent -0.9,-0.45 0.9,0.45, height 0.55
RES2512 [mm]
  rect 2x3.3 smd: 1(-3.1,0) 2(3.1,0)
  silkscreen extent -1.5,-1.55 1.5,1.55, body extent -3.15,-1.58 3.15,1.57, height 0.7
S1M-E3/5AT [mm] "S1M-E3/5AT"
  rect 2.35x1.55 smd: 1(-1.975,0) 2(1.975,0)
  silkscreen extent -3.42,-1.4 2.65,1.45, body extent -2.64,-1.4 2.64,1.39, height 2.29
SMBJ5.0A [mm]
  rect 2.35x2.2 smd: 1(-2.8,0) 2(2.8,0)
  silkscreen extent -3.57,-2 2.8,2, body extent -2.8,-1.97 2.79,1.97, height 2.44
SW712 [mm] "SM712 Series 600W Asymmetrical TVS Diode Array"
  rect 1.6x0.6 smd: 1(-0.9,0.95) 2(-0.9,-0.95) 3(0.9,0)
  silkscreen extent -1.03,-1.5 0.7,1.92, body extent -0.7,-1.52 0.7,1.52, height 1.12